# Altium PCB opg_control_unit_pcb.PcbDoc
Units mm, origin at the board's own origin, x right, y up, seen from the top; angles counter-clockwise.
Board outline 50 x 66.3 mm, 2 copper layers (Top Layer, Bottom Layer); 77 components, 60 nets, 283 pads, 75 vias.
Unrouted connection lines stored in the file: 1.
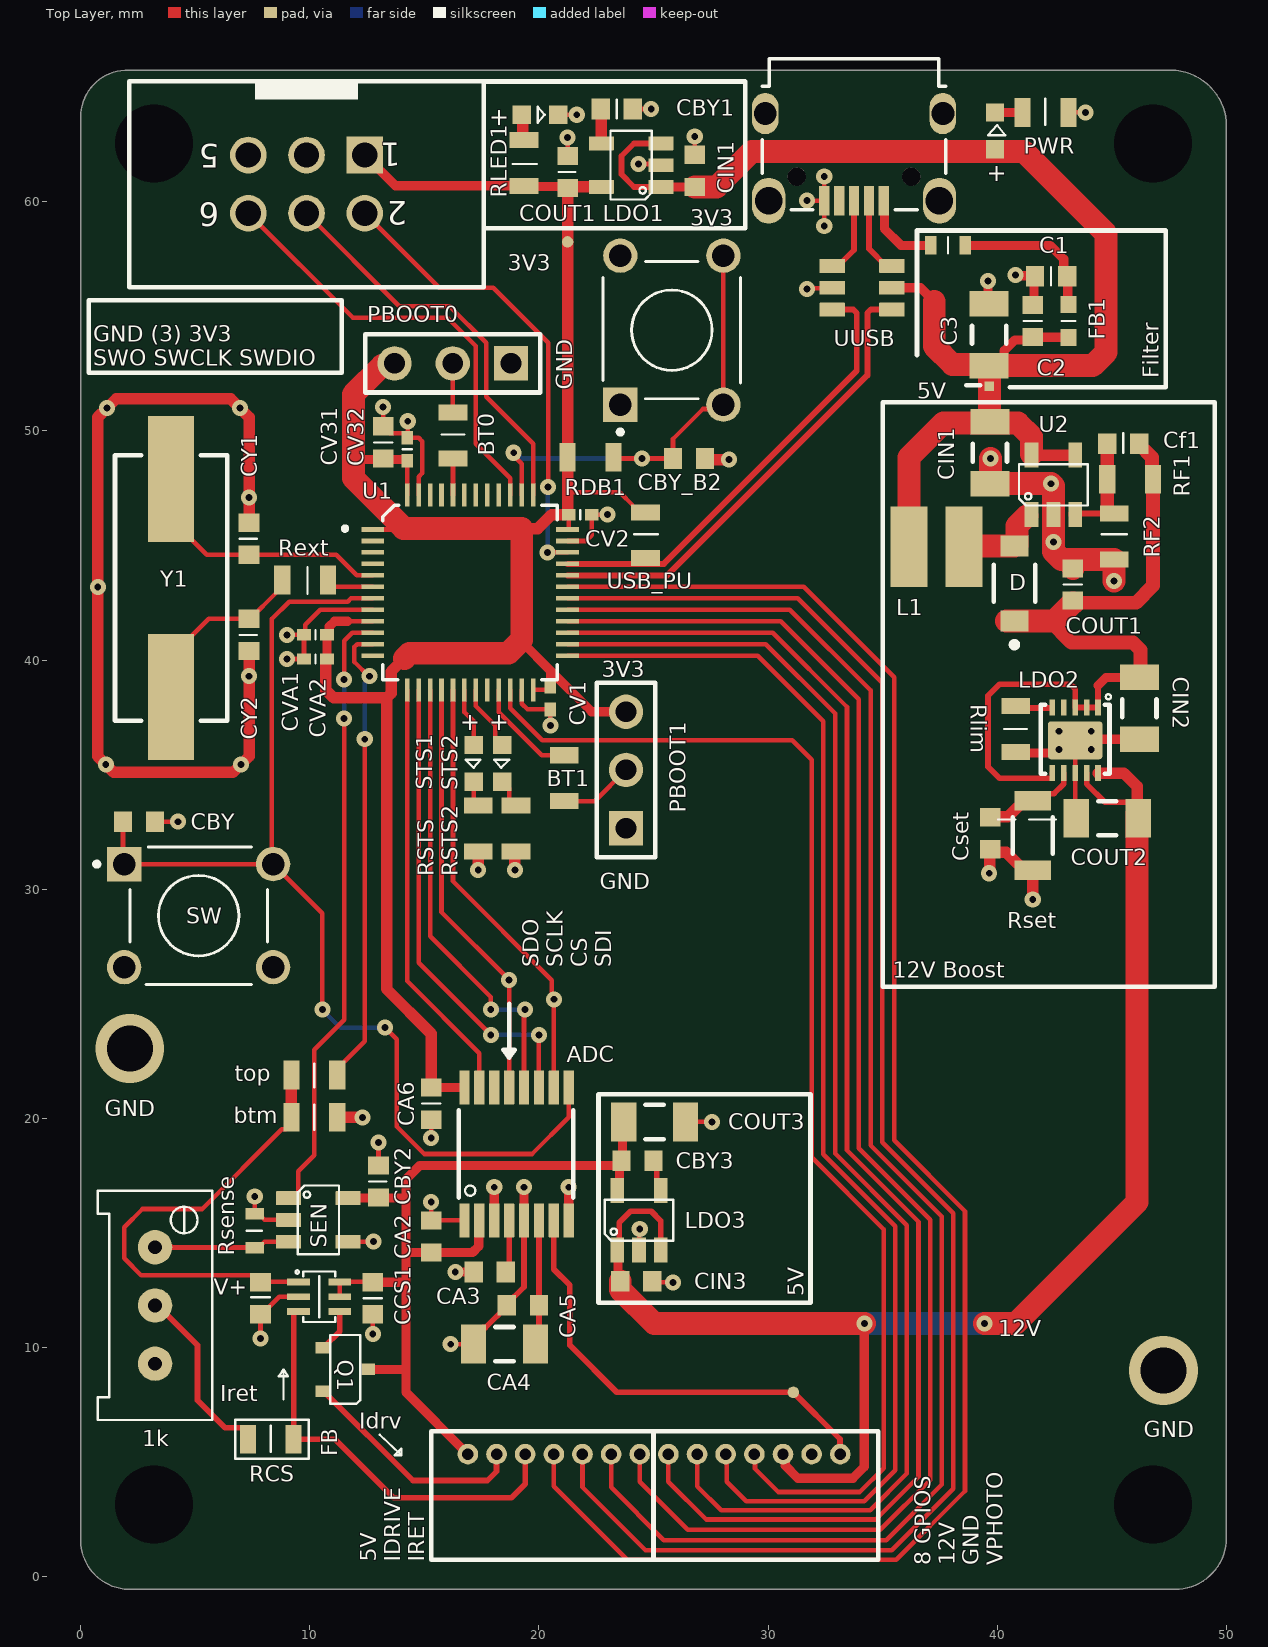
[diagram p0: Top Layer view]
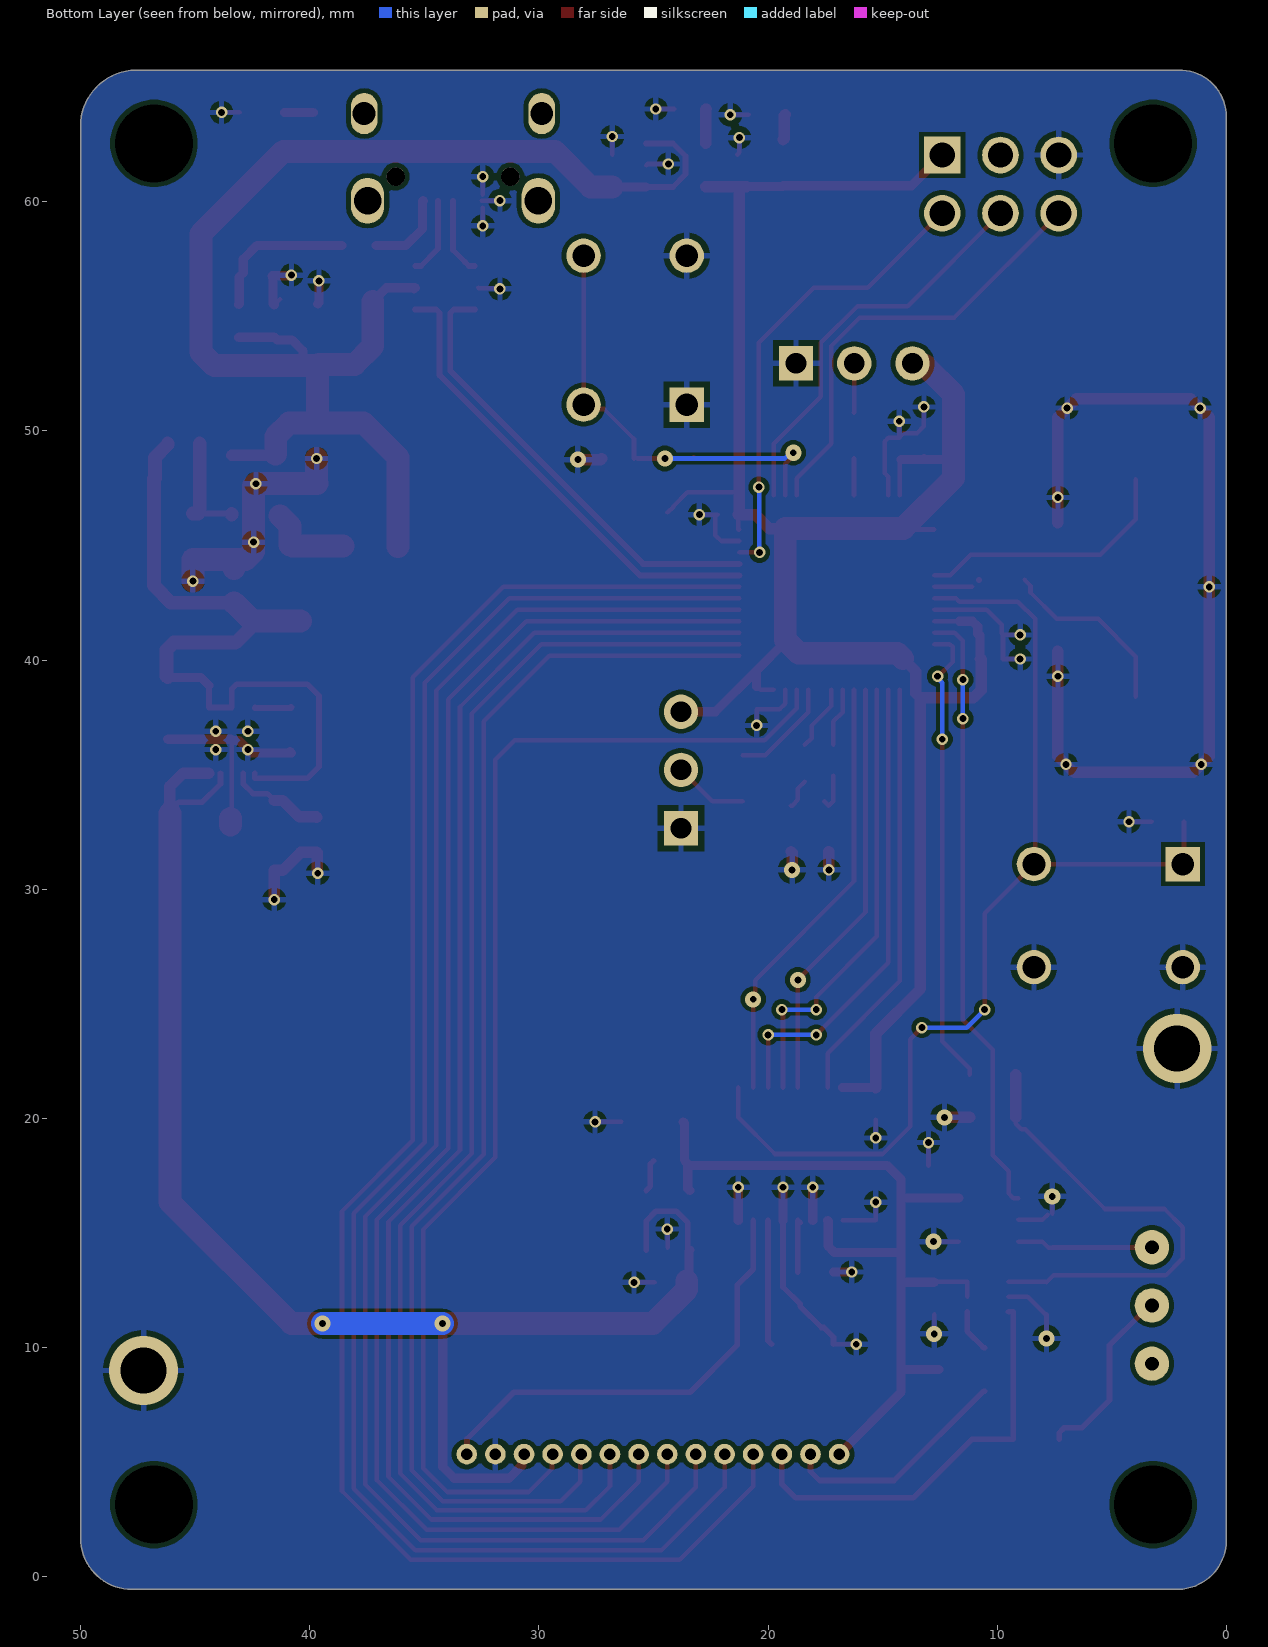
[diagram p1: Bottom Layer view, seen from below]

## Layer stack, top to bottom
Top Solder: solder mask 0.0102, Solder Resist, Dk 3.5
Top Layer: signal copper 0.0356
Dielectric 1: dielectric 0.32, FR-4, Dk 4.8
Bottom Layer: signal copper 0.0356
Bottom Solder: solder mask 0.0102, Solder Resist, Dk 3.5

## Board outline
0,1.6 0,63.7 cw(c2.05,63.7) 2.1,65.749 2.1,65.75 47.6,65.75 47.6,65.749 cw(c47.55,63.3) 50,63.3 50,1.7 cw(c47.75,1.7) 47.75,-0.55 2.15,-0.55 2.1,-0.549 cw(c2.15,1.6)

## Design rules (kind name [scope] priority, off if disabled: settings)
Clearance "Aisler Clearance" [All] p1: gap=0.2 ignorepadtopadclearanceinfootprint=FALSE except(0: Arc-Hole Track-Hole SMDPad-Hole THPad-Hole Via-Hole Fill-Hole Poly-Hole Region-Hole Text-Hole; 0.1: Arc-Arc Arc-Track Track-Track; 0.15: Arc-SMDPad Arc-THPad Arc-Fill Arc-Poly Arc-Region Track-SMDPad Track-THPad Track-Fill Track-Poly Track-Region SMDPad-SMDPad) // Aisler PCB constraints
Clearance [All] p2: gap=0.2 ignorepadtopadclearanceinfootprint=FALSE except(0: Arc-Hole Track-Hole SMDPad-Hole THPad-Hole Via-Hole Fill-Hole Poly-Hole Region-Hole Text-Hole; 0.1: SMDPad-SMDPad)
DiffPairsRouting [All] p1: maxlimit=0.254 minlimit=0.1 mostfreqgap=0.2 toplayer_minwidth=0.2 toplayer_maxwidth=0.381 toplayer_prefwidth=0.261 bottomlayer_minwidth=0.2 bottomlayer_maxwidth=0.381 bottomlayer_prefwidth=0.261 maxuncoupledlength=12.7
HoleSize [All] p1: absolutevalues=TRUE maxlimit=5 minlimit=0.025 maxpercent=80.000 minpercent=20.000
HoleToHoleClearance [All] p1: gap=0.2 allowstackedmicrovias=TRUE
MinimumSolderMaskSliver [All] p1: minsoldermaskwidth=0.1
NetAntennae [All] p1: netantennaetolerance=1
PolygonConnect [All] p1: connectstyle=Relief reliefconductorwidth=0.254 reliefentries=4 polygonreliefangle="90 Angle" airgapwidth=0.254
RoutingVias [All] p1: holewidth=1.5 width=2.5 viastyle="Through Hole" minholewidth=0.2 minwidth=0.4 maxholewidth=2 maxwidth=3
SilkToSilkClearance [All] p1: silktosilkclearance=0.1
SilkToSolderMaskClearance [IsPad] p1: minsilkscreentomaskgap=0.1 clearancetoexposedcopper=TRUE
SolderMaskExpansion [All] p1: expansion=0.102 istentingtop=FALSE
Width "Aisler Width" [All] p1: maxlimit=1 minlimit=0.1 preferedwidth=0.5 minimp=50.000000 maximp=50.000000 favimp=50.000000 // Aisler PCB Constraints
Width [All] p2: maxlimit=1 minlimit=0.1 preferedwidth=0.5 minimp=50.000000 maximp=50.000000 favimp=50.000000
23 further rules are at their usual default settings.

## Classes and differential pairs
component class U_opg_psu: Cf1 CIN2 COUT2 Cset D L1 LDO2 RF1 RF2 Rlim Rset U2
component class U_mcu_control_unit: BT0 BT1 C1 C2 C3 CBY CBY1 CIN1 COUT1 CV1 CV2 CV31 CV32 CVA1 CVA2 CY1 CY2 FB1 LDO1 PBOOT0 PBOOT1 PWR Rext RLED1 RSTS STS1 SW U1 USB_PU UUSB Y1
component class U_current_source: btm CBY2 CCS1 Q1 RCS Rsense SEN top
component class U_ads8671: ADC CA2 CA3 CA4 CA5 CA6 CBY3 CIN3 COUT3 LDO3
differential pair USB_IN: +USB_IN_P -USB_IN_N

## Components (designator, comment, footprint, x,y, rotation, side; value= is the part's Value field where it differs from the comment)
1k "BOURNS_3296W-1-102RLF" BOURNS_3296W-1 3.25,11.84 r270 top (schematic designator CS_POT)
ADC "ADS8671" ADS8671 21.3,15.55 r90 top
BT0 "100k" WRIS-KSKE_0805 16.25,49.8 r270 top (schematic designator RBOOT0)
BT1 "100k" WRIS-KSKE_0805 21.1,34.85 r90 top (schematic designator RBOOT1)
btm "100k" WRIS-KSKE_0805 10.2,20.05 r0 top (schematic designator CSdiv_btm)
C1 "" 1608[0603] 42.35,56.75 r0 top value="10n, X5R" (schematic designator USB_C1)
C2 "" 1608[0603] 41.55,54.8 r270 top value="100n, X5R" (schematic designator USB_C2)
C3 "" C1206 39.65,54.2 r270 top value="10u, X5R, 1206" (schematic designator USB_C3)
CA2 "X5R, 0603" 1608[0603] 15.3,14.85 r270 top value=1u
CA3 "X5R, 0603" 1608[0603] 17.85,13.3 r0 top value=4.7u
CA4 "X7R, 0805" C1206 18.5,10.15 r0 top value=10u
CA5 "X5R, 0603" 1608[0603] 19.3,11.85 r0 top value=1u
CA6 "X5R, 0603" 1608[0603] 15.3,20.65 r90 top value=1u
CBY "" 1608[0603] 2.55,32.95 r180 top value="10n, X5R"
CBY1 "" 1608[0603] 23.4,64.05 r180 top value="10n, X5R"
CBY2 "" 1608[0603] 13,17.25 r90 top value="0.1u, X5R"
CBY3 "" 1608[0603] 24.3,18.15 r180 top value=10nF
CBY_B2 "" 1608[0603] 26.55,48.8 r0 top value="10n, X5R"
CCS1 "" 1608[0603] 12.75,12.15 r90 top value="100n, X5R"
CCSV+ "" 1608[0603] 7.85,12.15 r270 top value="TODO, OPT"
Cf1 "" 1608[0603] 45.5,49.45 r0 top value=4.7p
CIN1 "" C1206 39.675,49.05 r90 top value=4.7u (schematic designator PSU_CIN1)
CIN1 "" 1608[0603] 26.8,61.35 r270 top value="1u, X5R"
CIN2 "" C1206 46.2,37.9 r90 top value="10u, 25 Vdc, X7R" (schematic designator PSU_CIN2)
CIN3 "X5R, 25V" 1608[0603] 24.25,12.9 r180 top value=1uF
COUT1 "" 1608[0603] 43.3,43.3 r270 top value=1u (schematic designator PSU_COUT1)
COUT1 "" 1608[0603] 21.25,61.3 r270 top value="1u, X5R"
COUT2 "" C1206 44.8,33.1 r0 top value="10u, 25 Vdc, X7R" (schematic designator PSU_COUT2)
COUT3 "X5R, 10V" C1206 25.05,19.85 r180 top value=10uF
Cset "" 1608[0603] 39.7,32.45 r90 top value=10n
CV1 "" 0402 20.5,38.35 r90 top value="0.1u, X5R"
CV2 "" 0402 21.8,46.35 r180 top value="0.1u, X5R"
CV31 "" 1608[0603] 13.2,49.5 r270 top value="4.7u, X5R"
CV32 "" 0402 14.25,49.2 r270 top value="0.1u, X5R"
CVA1 "" 0402 10.25,41.1 r0 top value="1u, X5R"
CVA2 "" 0402 10.25,40.05 r0 top value="10n, X5R"
CY1 "" 1608[0603] 7.35,45.3 r90 top value="22p, X5R"
CY2 "" 1608[0603] 7.35,41.1 r270 top value="22p, X5R"
D "MBR0540T1G" On_Semiconductor_425-04_MFG 40.75,43.35 r90 top (schematic designator D_PSU)
FB1 "33Ohm, 2.2A" "WE-CBF_0603_High Speed" 43.1,54.8 r90 top
J1 "629105150521 Footprint" 629105150521 33.75,62.95 r180 top
J2 "MOLEX_530481410_picoBlade_14pin" MOLEX_530481410_picoBlade_14pin 25,5.35 r180 top
L1 "10uH, 0.8A" WE-PD2_3521 37.35,44.95 r90 top
LDO1 "LDK130" LDK130 24,61.55 r180 top
LDO2 "LT3045" LT3045 43.4,36.5 r180 top
LDO3 "LT1761ES5-5#TRMPBF" LT1761ES5-5#TRMPBF 24.4,15.6 r90 top
LED1 "" WL-SMCW_0603_H=0.7mm 20.05,63.8 r180 top
OP1 "MAX44620AXT+T" MAX44260_ATX+T 10.4,12.2 r0 top
PBOOT0 "Header 3" HDR1X3 18.78,52.95 r180 top
PBOOT1 "Header 3" HDR1X3 23.8,32.67 r90 top
PSWD "61200621621" 61200621621 9.86,60.77 r180 top
PWR "" WL-SMCW_0603_H=0.7mm 39.9,63.1 r270 top (schematic designator LED2)
Q1 "BCW66_NPN" BCW66_NPN 11.55,9.05 r90 top
RCS "420" WRIS-KSKE_0805 8.3,6 r180 top
RDB1 "100k" WRIS-KSKE_0805 22.25,48.85 r180 top
Rext "47" WRIS-KSKE_0805 9.8,43.5 r180 top
RF1 "1M" WRIS-KSKE_0805 45.8,47.9 r0 top
RF2 "100k" WRIS-KSKE_0805 45.1,45.4 r90 top
RLED1 "2k" WRIS-KSKE_0805 19.35,61.7 r90 top
RLED2 "2k" WRIS-KSKE_0805 42.1,63.9 r180 top
Rlim "1k" WRIS-KSKE_0805 40.8,37 r90 top
RMEAS "1 Ohm, 1%" WRIS-KSKE_0603 37.85,58.1 r0 top
Rsense "1Ohm, 1%" WRIS-KSKE_0603 7.6,15.1 r270 top
Rset "121k" WRIS-KSKE_1206 41.55,32.35 r90 top
RSTS "2k" WRIS-KSKE_0805 17.35,32.65 r90 top
RSTS2 "2k" WRIS-KSKE_0805 19,32.65 r90 top
SEN "INA180A2/4" INA180Ax 10.35,15.55 r0 top
STS1 "" WL-SMCW_0603_H=0.7mm 17.15,35.5 r90 top (schematic designator LED_STS)
STS2 "" WL-SMCW_0603_H=0.7mm 18.4,35.5 r90 top (schematic designator LED2_STS)
SW "1825910-6" SW_1825910-6-4 5.15,28.85 r0 top
SW2 "1825910-6" SW_1825910-6-4 25.8,54.4 r90 top
top "50k" WRIS-KSKE_0805 10.2,21.9 r180 top (schematic designator CSdiv_top)
U1 "STM32F103CBT6" LQFP48_0R5_7x7 17,42.95 r270 top
U2 "LT1615" LT1615 42.45,47.65 r0 top
USB_PU "2k" WRIS-KSKE_0805 24.65,45.45 r90 top
UUSB "TPD2S017DBVR" TPD2S017DBVR 34.1,56.25 r0 top
Y1 "8MHz" WE-XTAL_HC49/4HSMX 3.95,43.15 r90 top

## Footprints (in the part's own frame and the unit in brackets; to place one, negate y for a bottom-side part, rotate by r counter-clockwise, add the part's x,y. Pads: shape width x height; smd on the part's side, far side on the other; paste and mask are expansions set on the pad)
0402 [mm] "Chip Capacitor, Body 1.0x0.5mm, IPC High Density"
  rect 0.6x0.5 smd: 1(-0.5,0) 2(0.5,0)
  body extent -0.55,-0.3 0.55,0.3, height 1.3
1608[0603] [mm] "Chip Capacitor, Body 1.6x0.8mm, IPC High Density"
  rect 0.8x0.9 smd: 1(-0.7,0) 2(0.7,0)
  body extent -0.87,-0.48 0.87,0.48, height 1.3
61200621621 [mm] "6 pins, straight, gold plating"
  rect 1.6x1.6 hole 1.1: 1(-2.54,-1.27)
  round 1.6 hole 1.1: 2(-2.54,1.27) 3(0,-1.27) 4(0,1.27) 5(2.54,-1.27) 6(2.54,1.27)
  silkscreen extent -7.74,-4.5 7.74,4.5, body extent -7.64,-4.43 7.64,4.75, height 9.13
629105150521 [mm] "Micro USB 2.0 SMT Type B Horizontal 5 Contacts High Current"
  rect 0.45x1.3 smd: 1(-1.3,2.9) 2(-0.65,2.9) 3(0,2.9) 4(0.65,2.9) 5(1.3,2.9)
  round 0.8 hole 0.8 unplated: MH1(-2.5,1.85) MH2(2.5,1.85)
  oval 1.15x1.8 hole 1: Shell(-3.875,-0.9) Shell(3.875,-0.9)
  oval 1.45x2 hole 1.2: Shell(-3.725,2.9) Shell(3.725,2.9)
  silkscreen extent -4,-3.3 4,3.3, body extent -4,-3.3 4,3.3, height 2.75
ADS8671 [mm] "14-Bit, High-Speed, Single Supply, SAR ADC Data Acq. System with progr., bipolar input ranges"
  rrect15% 1.5x0.45 smd: 1(0,4.55) 2(0,3.9) 3(0,3.25) 4(0,2.6) 5(0,1.95) 6(0,1.3) 7(0,0.65) 8(0,0) 9(5.8,0) 10(5.8,0.65) 11(5.8,1.3) 12(5.8,1.95) 13(5.8,2.6) 14(5.8,3.25) 15(5.8,3.9) 16(5.8,4.55)
  silkscreen extent 1,-0.2 4.8,4.8, body extent -0.3,-0.18 6.1,4.78, height 1.2
BCW66_NPN [mm] "Nexperia npn bjt transistor, general purpose"
  rect 0.5x0.6 smd: B(0.95,1) C(0,-1) E(-0.95,1)
  silkscreen extent -1.5,-0.65 1.5,0.65
BOURNS_3296W-1 [mm] "3296 - 3/8  Square Trimpot Trimming Potentiometer"
  round 1.5 hole 0.6: 1(-2.54,0) 2(0,0) 3(2.54,0)
  silkscreen extent -5,-2.5 5,2.5, body extent -4.77,-2.41 4.76,2.42, height 11.55
C1206 [mm] "Chip Capacitor, Body 3.2x1.6mm, IPC High Density"
  rect 1.1x1.7 smd: 1(-1.35,0) 2(1.35,0)
  silkscreen extent -0.4,-0.75 0.4,0.75, body extent -1.7,-0.9 1.7,0.9, height 1.3
HDR1X3 [mm] "Connector; Header; 3 Position"
  rect 1.5x1.5 hole 0.9: 1(0,0)
  round 1.5 hole 0.9: 2(2.54,0) 3(5.08,0)
  silkscreen extent -1.27,-1.27 6.35,1.27
INA180Ax [mm] "INA180AxLow- and High-SideVoltageOutput,Current-SenseAmplifiers"
  rrect7% 1.1x0.6 smd: 1(-1.275,0.975) 2(-1.275,0.025) 3(-1.275,-0.925) 4(1.325,-0.925) 5(1.325,0.975)
  silkscreen extent -0.88,-1.48 0.92,1.52, body extent -1.38,-1.43 1.42,1.47, height 1.55
LDK130 [mm] "300 mA low quiescent current very low noise LDO"
  rrect7% 1.1x0.6 smd: 1(-1.325,0.9) 2(-1.325,-0.05) 3(-1.325,-1) 4(1.275,-1) 5(1.275,0.9)
  silkscreen extent -0.93,-1.55 0.87,1.45, body extent -1.43,-1.5 1.37,1.4, height 1.55
LQFP48_0R5_7x7 [mm] "Low & medium-density value line, advanced ARM-based 32-bit MCU"
  rect 0.2x1 smd: 1(-2.75,-4.25) 2(-2.25,-4.25) 3(-1.75,-4.25) 4(-1.25,-4.25) 5(-0.75,-4.25) 6(-0.25,-4.25) 7(0.25,-4.25) 8(0.75,-4.25) 9(1.25,-4.25) 10(1.75,-4.25) 11(2.25,-4.25) 12(2.75,-4.25) 25(2.75,4.25) 26(2.25,4.25) 27(1.75,4.25) 28(1.25,4.25) 29(0.75,4.25) 30(0.25,4.25) 31(-0.25,4.25) 32(-0.75,4.25) 33(-1.25,4.25) 34(-1.75,4.25) 35(-2.25,4.25) 36(-2.75,4.25)
  rect 1x0.2 smd: 13(4.25,-2.75) 14(4.25,-2.25) 15(4.25,-1.75) 16(4.25,-1.25) 17(4.25,-0.75) 18(4.25,-0.25) 19(4.25,0.25) 20(4.25,0.75) 21(4.25,1.25) 22(4.25,1.75) 23(4.25,2.25) 24(4.25,2.75) 37(-4.25,2.75) 38(-4.25,2.25) 39(-4.25,1.75) 40(-4.25,1.25) 41(-4.25,0.75) 42(-4.25,0.25) 43(-4.25,-0.25) 44(-4.25,-0.75) 45(-4.25,-1.25) 46(-4.25,-1.75) 47(-4.25,-2.25) 48(-4.25,-2.75)
  silkscreen extent -3.81,-5.52 3.81,3.81, body extent -3.5,-3.5 3.5,3.5, height 1.6
LT1615 [mm] "Micropower Step-up DC/DC Converter in ThinSOT"
  rrect7% 0.6x1.1 smd: 1(-0.95,-1.3) 2(0,-1.3) 3(0.95,-1.3) 4(0.95,1.3) 5(-0.95,1.3)
  silkscreen extent -1.5,-0.9 1.5,0.9, body extent -1.45,-1.4 1.45,1.4, height 1.55
LT1761ES5-5#TRMPBF [mm]
  rrect7% 1.1x0.6 smd: 1(-1.342,0.982) 2(-1.342,0.032) 3(-1.342,-0.918) 4(1.258,-0.918) 5(1.258,0.982)
  silkscreen extent -0.94,-1.47 0.86,1.53, body extent -1.44,-1.42 1.36,1.48, height 1.55
LT3045 [mm] "20V, 500mA, Ultralow Noise, Ultrahigh PSRR LDO"
  rect 0.25x0.7 smd: 1(-1,-1.43) 2(-0.5,-1.43) 3(0,-1.43) 4(0.5,-1.43) 5(1,-1.43) 6(1,1.43) 7(0.5,1.43) 8(0,1.43) 9(-0.5,1.43) 10(-1,1.43)
  rrect15% 2.38x1.65 smd paste-2: 8(0,0)
  silkscreen extent -1.56,-2.01 1.5,1.45, body extent -1.55,-1.53 1.45,1.48, height 0.75
MAX44260_ATX+T [mm] "Operationsverstärker 1.8V, 15MHz Low-Offs et, Low-Power, Rail"
  rrect0% 1x0.3 smd mask+0.07: 1(-0.89,0.67) 2(-0.89,0.02) 3(-0.89,-0.63) 4(0.91,-0.63) 5(0.91,0.02) 6(0.91,0.67)
  silkscreen extent -1.02,-1.08 0.71,1.17, body extent -0.99,-0.98 1.01,1.02, height 1.05
MOLEX_530481410_picoBlade_14pin [mm] "pico Blade connector wire-to-board"
  round 0.9 hole 0.5: 1(-8.15,0) 2(-6.9,0) 3(-5.65,0) 4(-4.4,0) 5(-3.15,0) 6(-1.9,0) 7(-0.65,0) 8(0.6,0) 9(1.85,0) 10(3.1,0) 11(4.35,0) 12(5.6,0) 13(6.85,0) 14(8.1,0)
  silkscreen extent -9.8,-1 9.7,4.6, body extent -9.65,-0.92 9.6,4.57, height 3.6
On_Semiconductor_425-04_MFG [mil]
  rect 36x48 smd paste+0 mask+0: 1(-64.5,0) 2(64.5,0)
  silkscreen extent -110,-35 32,35, body extent -86,-39 86,39, height 10
SW_1825910-6-4 [mm]
  rect 1.498x1.498 hole 0.99: 1(-3.25,2.25)
  round 1.498 hole 0.99: 2(3.25,2.25) 3(-3.25,-2.25) 4(3.25,-2.25)
  silkscreen extent -4.54,-3 3,3
TPD2S017DBVR [mm] "2-Channel Ultra-Low Clamp Voltage ESD  Solution With Series-Resistor Isolation"
  rrect5% 1.1x0.6 smd: 1(-1.3,0.95) 2(-1.3,0) 3(-1.3,-0.95) 4(1.3,-0.95) 5(1.3,0) 6(1.3,0.95)
  body extent -1.4,-1.45 1.4,1.45, height 1.2
"WE-CBF_0603_High Speed" [mm] "SMD EMI Suppression Ferrite  Bead, body 1.6x0.8mm"
  rect 0.75x0.7 smd: 1(-0.725,0) 2(0.725,0)
  body extent -0.8,-0.4 0.8,0.4, height 0.8
WE-PD2_3521 [mm] "SMD Power Inductor, 2-Leads, body 3x3.5mm"
  rect 3.5x1.6 smd: 1(0,1.2) 2(0,-1.2)
  body extent -1.5,-1.68 1.5,1.68, height 2.12
WE-XTAL_HC49/4HSMX [mm] "Quartz Crystal, size HC49/4HSMX, body 11.4x4.9mm"
  rect 5.5x2 smd: 1(-4.75,0) 2(4.75,0)
  silkscreen extent -5.8,-2.45 5.8,2.45, body extent -6.7,-2.45 6.7,2.45, height 4.3
WL-SMCW_0603_H=0.7mm [mm] "SMD Mono-color Chip LED, body 1.6x0.8mm"
  rect 0.8x0.8 smd: 1(-0.8,0) 2(0.8,0)
  body extent -0.8,-0.4 0.8,0.4, height 0.7
WRIS-KSKE_0603 [mm] "Thick Film Resistors, SMT, body size 1.6x0.8mm"
  rect 0.5x0.8 smd: 1(-0.75,0) 2(0.75,0)
  body extent -0.8,-0.4 0.8,0.4, height 0.45
WRIS-KSKE_0805 [mm] "Thick Film Resistors, SMT, body size 2x1.25mm"
  rect 0.7x1.25 smd: 1(-1,0) 2(1,0)
  body extent -1,-0.62 1,0.63, height 0.6
WRIS-KSKE_1206 [mm] "Thick Film Resistors, SMT, body size 3.1x1.6mm"
  rect 0.85x1.6 smd: 1(-1.525,0) 2(1.525,0)
  silkscreen extent -0.8,-0.87 0.8,0.87, body extent -1.55,-0.8 1.55,0.8, height 0.6

## Part data
1k: library part BOURNS_3296W-1-104RLF, "Vertical Potentiometer, multi-turn, 10%"
ADC: "14-Bit, High-Speed, Single Supply, SAR ADC Data Acq. System with progr., bipolar input ranges"
BT0 BT1 btm RCS RDB1 Rext RF1 RF2 RLED1 RLED2 Rlim RSTS RSTS2 top USB_PU: library part 560050320001, "WRIS-KSKE SMT Thick Film Resistor, size 0805, 0.1Ohm, 0.33W", Manufacturer="Wurth Elektronik", Operating Temperature="-55 to +155degC", Rated Current=1.81A, Rated Power=0.33W, Resistance=0.1Ohm, Resistance Tolerance=+/-1%, Temperature Coefficient of Resistance=250ppm/degC, ComponentLink1Description=Manufacturer, ComponentLink1URL=http://www.we-online.de, ComponentLink2Description=Datasheet, ComponentLink2URL=https://www.we-online.com/catalog/datasheet/560050320001.pdf, Height=0.6mm, Length=2mm, Manufacturer Part Number=560050320001, Mounting Technology=SMT, Packaging="Tape and Reel", Published Date="May 2020", Size=0805, Technical Reference=KE0805R100F103LAATP0000, Width=1.25mm
C1 C2 C3 CA2 CA3 CA4 CA5 CA6 CBY CBY1 CBY2 CBY3 CBY_B2 CCS1 CCSV+ Cf1 CIN1 CIN1 CIN2 CIN3 COUT1 COUT1 COUT2 COUT3 Cset CV1 CV2 CV31 CV32 CVA1 CVA2 CY1 CY2: library part "Cap Semi", "Capacitor (Semiconductor SIM Model)", LatestRevisionDate=29-May-2009, LatestRevisionNote="IPC-7351 Footprint Added.", PackageDescription="Chip Capacitor", PackageReference=C1206, Published=8-Jun-2000, Publisher="Altium Limited"
FB1: library part 742792605, "WE-CBF SMT EMI Suppression Ferrite Bead, size 0603, 33Ohm, 2.2A", DC Resistance max.=0.1Ohm, Manufacturer="Wurth Elektronik", Operating Temperature="-55 to +125degC", Rated Current=2.2A, ComponentLink1Description=Manufacturer, ComponentLink1URL=http://www.we-online.de, ComponentLink2Description=Datasheet, ComponentLink2URL=https://www.we-online.com/catalog/datasheet/742792605.pdf, Impedance @100MHz=33Ohm, Impedance max.=50Ohm, Manufacturer Part Number=742792605, Mounting Technology=SMT, Packaging="Tape and Reel", Published Date="March 2020", Size=0603, Type="High Speed"
J1: library part 629105150921, "Micro USB 2.0 Type AB, Receptacle, Horizontal, SMT", Manufacturer="Wurth Elektronik", Operating Temperature="-40 to +85degC", Rated Current=1.8A, Working Voltage=30VAC, Application="Micro USB 2.0", ComponentLink1Description=Manufacturer, ComponentLink1URL=http://www.we-online.de, ComponentLink2Description=Datasheet, ComponentLink2URL=https://katalog.we-online.com/em/datasheet/629105150921.pdf, Gender=Receptacle, Interface Type="Type AB", Manufacturer Part Number=629105150921, Mounting Technology=SMT, Packaging="Tape and Reel", Pin Number=5, Published Date="August 2020", Type=Horizontal
L1: library part 7447732110, "WE-PD2 SMT Power Inductor, size 3521, 10uH, 0.8A", DC Resistance max.=0.3Ohm, DC Resistance typ.=0.237Ohm, Inductance=10uH, Manufacturer="Wurth Elektronik", Operating Temperature="-40 to +125degC", Rated Current=0.8A, Saturation Current=1.23A, Self Resonant Frequency=45MHz, ComponentLink1Description=Manufacturer, ComponentLink1URL=http://www.we-online.de, ComponentLink2Description=Datasheet, ComponentLink2URL=https://www.we-online.com/catalog/datasheet/7447732110.pdf, Manufacturer Part Number=7447732110, Mounting Technology=SMT, Packaging="Tape and Reel", Published Date="April 2020", Size=3521
LDO1: "300 mA low quiescent current very low noise LDO"
LDO2: "20V, 500mA, Ultralow Noise, Ultrahigh PSRR LDO"
LED1 PWR STS1 STS2: library part 150060AS75000, "WL-SMCW SMT Mono-color Chip LED Waterclear, size 0603, Amber, 2V, 140deg", Emitting Color=Amber, Forward Voltage typ.=2V, Operating Temperature="-40 to +85degC", Chip Technology=AlInGaP, ComponentLink1Description=Manufacturer, ComponentLink1URL=http://www.we-online.de, ComponentLink2Description=Datasheet, ComponentLink2URL=https://www.we-online.com/catalog/datasheet/150060AS75000.pdf, Dominant Wavelength typ.=605nm, Luminous Intensity typ.=130mcd, Mounting Technology=SMT, Packaging="Tape and Reel", Part Number=150060AS75000, Peak Wavelength typ.=610nm, Published Date="December 2019", Publisher="Wurth Elektronik", Size=0603, Viewing Angle=140deg
OP1: "Operationsverstärker 1.8V, 15MHz Low-Offs et, Low-Power, Rail"
PBOOT0 PBOOT1: "Header, 3-Pin", LatestRevisionDate=17-Jul-2002, LatestRevisionNote="Re-released for DXP Platform.", Publisher="Altium Limited"
PSWD: "Male Box Header WR-BHD, THT, Vertical, pitch 2.54 mm, 6 pins", Contact Resistance="20 mOhm", Operating Temperature="-40 to 125 degC", Withstanding Voltage="500 VAC", Working Voltage="250 VAC", ComponentLink1Description=Manufacturer, ComponentLink1URL=http://www.we-online.de, ComponentLink2Description=Datasheet, ComponentLink2URL=https://katalog.we-online.de/em/datasheet/6120xx21621.pdf, Gender=Male, Mounting Technology=THT, Orientation=Vertical, Packaging=Tray, Part Number=61200621621, Pin Number=6, Pitch="2.54 mm", Published Date="August 2018", Publisher="Wurth Elektronik"
RMEAS: library part 560050316011, "WRIS-KSKE SMT Thick Film Resistor, size 0603, 0.5Ohm, 0.25W", Manufacturer="Wurth Elektronik", Operating Temperature="-55 to +155degC", Rated Current=0.7A, Rated Power=0.25W, Resistance=0.5Ohm, Resistance Tolerance=+/-1%, Temperature Coefficient of Resistance=+/-100ppm/degC, ComponentLink1Description=Manufacturer, ComponentLink1URL=http://www.we-online.de, ComponentLink2Description=Datasheet, ComponentLink2URL=https://www.we-online.com/catalog/datasheet/560050316011.pdf, Height=0.45mm, Length=1.6mm, Manufacturer Part Number=560050316011, Mounting Technology=SMT, Packaging="Tape and Reel", Published Date="May 2020", Size=0603, Technical Reference=KE0603R500F104KAATP0000, Width=0.8mm
Rsense: library part 560050316001, "WRIS-KSKE SMT Thick Film Resistor, size 0603, 0.1Ohm, 0.25W", Manufacturer="Wurth Elektronik", Operating Temperature="-55 to +155degC", Rated Current=1.58A, Rated Power=0.25W, Resistance=0.1Ohm, Resistance Tolerance=+/-1%, Temperature Coefficient of Resistance=250ppm/degC, ComponentLink1Description=Manufacturer, ComponentLink1URL=http://www.we-online.de, ComponentLink2Description=Datasheet, ComponentLink2URL=https://www.we-online.com/catalog/datasheet/560050316001.pdf, Height=0.45mm, Length=1.6mm, Manufacturer Part Number=560050316001, Mounting Technology=SMT, Packaging="Tape and Reel", Published Date="May 2020", Size=0603, Technical Reference=KE0603R100F104LAATP0000, Width=0.8mm
Rset: library part 560050332001, "WRIS-KSKE SMT Thick Film Resistor, size 1206, 0.05Ohm, 0.5W", Manufacturer="Wurth Elektronik", Manufacturer Part Number=560050320001, Operating Temperature="-55 to +155degC", Rated Current=1.81A, Rated Power=0.33W, Resistance=0.1Ohm, Resistance Tolerance=+/-1%, Temperature Coefficient of Resistance=250ppm/degC, ComponentLink1Description=Manufacturer, ComponentLink1URL=http://www.we-online.de, ComponentLink2Description=Datasheet, ComponentLink2URL=https://www.we-online.com/catalog/datasheet/560050320001.pdf, Height=0.6mm, Length=2mm, Mounting Technology=SMT, Packaging="Tape and Reel", Published Date="May 2020", Size=0805, Technical Reference=KE0805R100F103LAATP0000, Width=1.25mm
SEN: library part INA180Ax, "INA180Ax Low- and High-SideVoltageOutput,Current-SenseAmplifiers"
SW SW2: "Switch Push Button OFF _ON_ SPST Round Button 0.05A 24VDC Momentary Contact PC Pins Thru-Hole", Contact_Current_Rating="50 mA", Package=None, Configuration_Pole-Throw="Single Pole - Single Throw", Digi-Key_Part_Number=450-1650-ND, Digi-Key_Purchase_URL=https://www.digikey.com/product-detail/en/te-connectivity-alcoswitch-switches/1825910-6/450-1650-ND/1632536?utm_source=snapeda&utm_medium=aggregator&utm_campaign=symbol, EU_RoHS_Compliance=Compliant, MF="TE Connectivity", MP=1825910-6, SnapEDA_Link=https://www.snapeda.com/parts/1825910-6/TE%20Connectivity%20ALCOSWITCH%20Switches/view-part/424522/?ref=snap, TE_purchase_URL=https://www.te.com/usa-en/product-1825910-6.html?te_bu=Cor&te_type=disp&te_campaign=seda_glo_cor-seda-global-disp-prtnr-fy19-seda-model-bom-cta_sma-317_1&elqCampaignId=32493
U1: "Medium-density performance line ARM-based 32-bit MCU with 64KB Flash", Manuf_1=STM, Manuf_Part_1=STM32F103C8T6, Distrib=ST, ECCN_US/EU=3A991A2/NEC, Order=STM32F103C8T6, Provided=ST, Ref St=9175981
U2: "Micropower Step-up DC/DC Converter in ThinSOT"
UUSB: "2-Channel Ultra-Low Clamp Voltage ESD / Solution With Series-Resistor Isolation"
Y1: library part 830003151, "WE-XTAL Quartz Crystal, SMT, HC49/4HSMX, 8MHz, +/-30ppm", Frequency Stability=+/-50ppm, Frequency Tolerance=+/-30ppm, Load Capacitance=16pF, Manufacturer="Wurth Elektronik", Operating Temperature="-10 to +60degC", ComponentLink1Description=Manufacturer, ComponentLink1URL=http://www.we-online.de, ComponentLink2Description=Datasheet, ComponentLink2URL=https://katalog.we-online.com/pbs/datasheet/830003151.pdf, Frequency=8MHz, Manufacturer Part Number=830003151, Mounting Technology=SMT, Packaging="Tape and Reel", Published Date="July 2020", Size=HC49/4HSMX

## Free pads (board coordinates)
  round 1.1 hole 3.4 unplated: 2(3.2,62.55) 2(46.8,62.55) 3(46.8,3.15) 4(3.2,3.15)
  rect 0.4x0.4 smd: 6(39.65,51.95)
  round 0.5 smd: 10(31.1,8.05) 11(21.25,58.25)

## Via types
v1: diameter 0.7/0.5 (per signal layer), hole 0.3, Top Layer to Bottom Layer, 60 vias
v2: diameter 0.7, hole 0.3, Top Layer to Bottom Layer, 13 vias
v3: diameter 3, hole 2, Top Layer to Bottom Layer, 2 vias

## Nets (pads, with @x,y where several pads share a name; then routed paths per layer and width w, separated by ;. In a path a pad name is that pad's centre, name@x,y a point inside that pad or via, vN(x,y) a via of type N, cw(c..) or ccw(c..) an arc to the next point about the centre after c; other vN are vias at no path point)
3V3CC: ADC.16 CA6.2 COUT1.2@21.25,60.6 CV1.2 CV2.2 CV31.2 CV32.2 CVA1.2 CVA2.2 LDO1.5 pad.11 PBOOT0.3 PBOOT1.3 PSWD.1 RDB1.2 RLED1.1 U1.1 U1.9 U1.24 U1.36 U1.48 USB_PU.2 | length 98.1
  Top Layer w0.2: 11.65,41.7 U1.9 ; U1.1 14.05,45.7 14.1,45.75 ; CV32.2@14.2,48.75 CV32.2 U1.48 ; U1.24 20.35,38.7 CV1.2 ; U1.36 21.3,45.7 CV2.2 ; 21.25,47.15 21.421,47.321 23.529,47.321 24.125,46.725 24.125,46.7 24.375,46.45 USB_PU.2@24.4,46.45
  Top Layer w0.4: CVA2.2 CVA1.2 10.8,41.1 10.85,41.15 10.85,41.466 11.084,41.7 11.65,41.7 ; 11.9,48.75 13.15,48.75 CV31.2 13.25,48.75 CV32.2@14.2,48.75 ; PSWD.1 13.74,60.7 RLED1.1 19.375,60.675 COUT1.2@20.925,60.675 ; CA6.2 ADC.16 ; 19.25,40.886 19.25,40.8 20.5,39.55 ; CV1.2 20.5,39.55 ; PBOOT1.3 22.3,37.75 20.5,39.55
  Top Layer w0.5: CVA2.2 10.704,40.05 10.704,39.485 10.7,39.481 10.7,38.693 11.043,38.35 13.35,38.35 ; 14.125,40.075 13.55,39.5 13.55,38.55 13.35,38.35 ; CA6.2 15.3,23.7 13.35,25.65 13.35,38.35 ; 19.25,45.739 19.939,45.739 20.55,46.35 CV2.2 21.25,46.35 21.25,47.15 RDB1.2 21.25,60.6 21.25,60.64 COUT1.2@21.24,60.65 ; COUT1.2@20.95,60.65 COUT1.2@21.24,60.65 ; LDO1.5 COUT1.2@21.24,60.65
  Top Layer w1: PBOOT0.3 13.604,52.854 13.154,52.854 11.9,51.6 11.9,48.75 11.9,47.95 14.1,45.75 ; 14.089,45.739 19.25,45.739 19.25,40.886 18.664,40.3 14.35,40.3 14.125,40.075
5V_AVDD: ADC.2 CA2.2 CBY2.1 CBY3.2 CCS1.2 COUT3.2 J2.14 LDO3.5 OP1.5 OP1.6 Q1.C SEN.5 | length 37.8
  Top Layer w0.2: OP1.5 OP1.6 12.73,12.87 CCS1.2
  Top Layer w0.4: SEN.5 13,16.525 14.175,16.525 14.2,16.55 ; Q1.C 14.2,9.05 ; CCS1.2 14.2,12.85 ; 14.3,14.15 CA2.2 17.1,14.15 17.375,14.425 17.375,15.525 ADC.2 ; J2.14 14.2,8.05 14.2,9.05 ; LDO3.5 23.509,16.949 CBY3.2@23.509,17.9 ; COUT3.2 23.65,19.8 23.65,18.2 CBY3.2 23.6,18.1 23.45,17.95 14.8,17.95 14.2,17.35 14.2,16.55 ; 14.2,9.05 14.2,12.85 ; 14.2,12.85 14.2,14.15 14.2,16.55
5VCC_USB: C2.2 C3.2 CIN1.2 FB1.1 L1.1 LDO1.1 LDO1.3 pad.6 PWR.2 U2.4 U2.5 UUSB.5 | length 62.8
  Top Layer w0.25: LDO1.1 24.15,60.65 23.6,61.2 23.6,62 24.15,62.55 LDO1.3
  Top Layer w0.4: LDO1.1 CIN1.2@26.8,60.65 ; UUSB.5@35.45,56.2 UUSB.5 36.65,56.25 37.25,55.65 ; CIN1.2@39.65,50.35 CIN1.2@39.65,50.4 ; C3.2@39.95,52.85 40.3,53.2 40.3,53.5 40.776,53.976 41.426,53.976 C2.2 41.563,54.087 43.088,54.087 FB1.1
  Top Layer w0.5: U2.5@41.5,49 41.55,48.95 U2.4
  Top Layer w1: CIN1.2@26.8,60.65 27.75,60.65 29.3,62.2 41.15,62.2 44.75,58.6 44.75,53.436 44.164,52.85 39.95,52.85 C3.2 39.6,52.9 38.05,52.9 37.25,53.7 37.25,55.65 ; L1.1 36.15,48.85 37.65,50.35 CIN1.2@39.65,50.35 ; C3.2@39.662,52.838 39.662,50.413 39.675,50.4 39.725,50.35 40.9,50.35 41.486,49.764 41.486,49 U2.5@41.5,49
5VCC_USB_IN: C1.2 FB1.2 RMEAS.2 | length 6.6
  Top Layer w0.4: RMEAS.2 42.3,58.1 42.901,57.499 42.901,56.899 43.075,56.725 43.075,55.55 FB1.2
AUX_IN: CBY_B2.1 RDB1.1 SW2.3 SW2.4 U1.38 | length 20.3
  Top Layer w0.2: v2(18.9,49.05) 18.9,48.915 19.25,48.565 U1.38 ; RDB1.1 23.3,48.8 v2(24.5,48.8) CBY_B2.1@25.7,48.8 ; CBY_B2.1 25.85,49.65 27.158,50.958 27.858,50.958 SW2.3 SW2.4
  Bottom Layer w0.2: v2(18.9,49.05) 19.017,49.05 19.267,48.8 v2(24.5,48.8)
BOOT0: BT0.2 U1.44 | length 1.6
  Top Layer w0.2: U1.44 BT0.2
BOOT1: BT1.2 U1.21 | length 4.6
  Top Layer w0.2: U1.21 18.25,37.725 20.125,35.85 BT1.2
FB: J2.12 OP1.3 RCS.1 | length 18.5
  Top Layer w0.25: OP1.3 9.325,11.57 9.3,11.545 RCS.1 9.45,6 11.1,6 13.65,3.45 18.8,3.45 19.4,4.05 J2.12
GND: ADC.1 ADC.3 ADC.5 ADC.8 btm.2 C1.1 C2.1 C3.1 CA2.1 CA3.1 CA4.1 CA5.1 CA6.1 CBY1.1 CBY2.2 CBY.1 CBY_B2.2 CCS1.1 CCSV+.2 CIN1.1 CIN2.1 CIN3.1 COUT1.1 COUT2.1 COUT3.1 Cset.1 CV1.1 CV2.1 CV31.1 CV32.1 CVA1.1 CVA2.1 CY1.2 CY2.2 J1.5 J2.2 LDO1.2 LDO2.8 LDO3.2 LED1.1 OP1.2 PBOOT0.1 PBOOT1.1 PSWD.5 RF2.1 RLED2.1 Rlim.1 Rsense.1 Rset.1 RSTS2.1 RSTS.1 SEN.2 SEN.4 SW2.1 SW2.2 SW.3 SW.4 U1.8 U1.23 U1.35 U1.47 U2.2 UUSB.2 | length 123.7
  Top Layer w0.2: CBY.1 v1(4.25,32.95) ; Rsense.1 v2(7.6,16.6) ; Rsense.1@7.8,15.8 8.025,15.575 SEN.2 ; v2(7.85,10.4) CCSV+.2 7.9,11.45 8.67,12.22 OP1.2 ; v1(9,40.05) CVA2.1 CVA1.1 ; v1(9,41.1) CVA1.1 ; SEN.4 v2(12.775,14.625) ; v2(12.75,10.6) CCS1.1 ; U1.8 10.45,42.2 9.8,41.55 9.8,41.15 CVA1.1 ; CBY2.2@13,17.94 v1(13,18.95) ; CV31.1 13.5,49.9 14.1,49.9 14.25,49.75 CV32.1 14.75,49.7 14.9,49.55 14.9,48.15 14.75,48 U1.47 ; CV31.1@13.2,50.25 v1(13.2,51.05) ; CV32.1@14.275,49.775 v1(14.275,50.425) ; v1(15.3,16.35) CA2.1 ADC.1 ; v1(15.3,19.15) CA6.1 ; v1(16.15,10.15) CA4.1 ; CA5.1 CA5.1@18.6,11.9 ; U1.23 19.25,38.1 19.5,37.85 CV1.1 v1(20.5,37.15) ; LED1.1 v1(21.65,63.8) ; U1.35 22.05,45.2 22.3,45.45 CV2.1 ; v1(21.25,62.8) 21.25,62.15 COUT1.1@21.35,62.05 ; CV2.1@22.2,46.35 CV2.1 ; v1(23,46.35) CV2.1 ; CBY1.1 v1(24.9,64.05) ; v1(24.35,61.65) 25.275,61.65 LDO1.2 ; LDO3.2@24.384,14.366 24.384,15.159 v1(24.4,15.175) ; CIN3.1@24.95,12.85 v1(25.85,12.85) ; COUT3.1 v1(27.55,19.85) ; CIN1.1@26.8,62.05 v1(26.8,62.85) ; v1(31.7,56.2) 31.725,56.225 32.625,56.225 UUSB.2@32.65,56.25 ; v1(31.7,60.05) J1.5@32.5,60.05 ; v1(32.45,58.95) J1.5@32.45,59.75 ; J1.5@32.45,60.3 v1(32.45,61.1) ; C2.1@41.3,55.75 C2.1 ; RLED2.1@43.05,63.9 v1(43.85,63.9) ; COUT2.1@43.4,33.3 43.4,35.07 LDO2.8@43.4,36.5
  Top Layer w0.25: CA4.1 17.15,10.45 17.575,10.875 17.675,10.875 18.6,11.8 CA5.1 ; CA5.1@18.6,11.9 19.35,12.65 ADC.5
  Top Layer w0.4: v1(16.35,13.3) CA3.1 ; ADC.3 v1(18.05,17) ; ADC.5 v1(19.35,17) ; ADC.8 v1(21.3,17) ; v1(39.6,56.55) 39.6,55.6 C3.1 ; Rlim.1@40.8,35.95 Rlim.1@40.849,35.999 ; v1(40.8,56.8) 40.825,56.775 41.625,56.775 C1.1 41.6,56.7 41.6,55.55 C2.1 ; Rlim.1@40.849,35.949 42.549,35.949 v1(42.7,36.1) 43.1,36.5 43.4,36.5 43.45,36.55 CIN2.1
  Top Layer w0.5: CY2.2 7.35,35.8 v1(7,35.45) 6.65,35.1 1.45,35.1 0.75,35.8 v1(0.75,43.2) 0.75,50.6 v1(1.15,51) 1.55,51.4 6.55,51.4 7.35,50.6 v1(7.35,47.1) CY1.2 ; btm.2 v2(12.3,20.05) ; v1(17.35,30.85) RSTS.1 ; v2(18.95,30.85) 18.95,31.6 RSTS2.1 ; CBY_B2.2 27.3,48.75 v2(28.3,48.75) ; v1(39.65,30.7) 39.675,30.725 39.675,31.6 39.684,31.609 40.391,31.609 41.175,30.825 Rset.1 ; Rset.1@41.525,30.825 41.55,30.8 v1(41.55,29.55)
  Top Layer w1: v1(39.7,48.8) 39.7,47.725 39.675,47.7 v1(42.35,47.7) 42.45,47.6 U2.2 42.45,44.75 42.8,44.4 COUT1.1@43.3,44.4 ; COUT1.1@43.3,44 43.3,44.35 43.35,44.4 RF2.1 v1(45.1,43.45) ; COUT2.1@43.45,32.8 COUT2.1
  other v1: 1.1,35.45 44.1,36.1 42.7,36.9 44.1,36.9 7.35,39.3 42.45,45.15 6.95,51
  other v3: 47.25,9 2.15,23.05
NetADC_4: ADC.4 CA3.2 | length 2.4
  Top Layer w0.25: ADC.4@18.6,15.45 ADC.4 18.7,15.45 CA3.2@18.7,13.3
NetADC_6: ADC.6 CA4.2 CA5.2 | length 5.5
  Top Layer w0.25: CA4.2 20,10.3 CA5.2 ADC.6
NetADC_7: ADC.7 J2.1 pad.10 | length 22
  Top Layer w0.25: J2.1 33.142,5.358 33.142,6.008 pad.10 23.4,8.05 21.35,10.1 21.35,12.724 20.65,13.424 ; 20.65,13.424 ADC.7 20.65,13.424
NetADC_10: ADC.10 U1.17 | length 19.2
  Top Layer w0.2: U1.17 16.25,30.35 20.565,26.035 20.565,25.285 v2(20.65,25.2) ADC.10
NetADC_11: ADC.11 U1.14 | length 20.8
  Top Layer w0.2: U1.14 14.75,26.8 v1(17.9,23.65) ; ADC.11 v1(20,23.65)
  Bottom Layer w0.2: v1(17.9,23.65) v1(20,23.65)
NetADC_12: ADC.12 U1.15 | length 20
  Top Layer w0.2: U1.15 15.25,27.95 17.9,25.3 v1(17.9,24.75) ; ADC.12 19.35,24.7 v1(19.4,24.75)
  Bottom Layer w0.2: v1(17.9,24.75) v1(19.4,24.75)
NetADC_13: ADC.13 U1.16 | length 18.6
  Top Layer w0.2: U1.16 15.75,29 v2(18.7,26.05) ADC.13
NetADC_15: ADC.15 U1.13 | length 18.7
  Top Layer w0.2: U1.13 14.25,26 17.4,22.85 ADC.15
NetCBY1_2: CBY1.2 LDO1.4 | length 1.5
  Top Layer w0.5: CBY1.2 22.713,64.037 22.713,62.563 LDO1.4
NetCBY3_1: CBY3.1 LDO3.4 | length 1.4
  Top Layer w0.25: CBY3.1 25.143,18.007 25.143,17.033 LDO3.4
NetCCSV+_1: btm.1 CCSV+.1 OP1.1 top.2 | length 20.7
  Top Layer w0.2: btm.1 9.2,19.775 8.95,19.525 8.775,19.525 5.3,16.05 2.7,16.05 1.9,15.25 1.9,13.9 2.65,13.15 7.55,13.15 CCSV+.1 7.87,12.87 OP1.1
  Top Layer w0.5: btm.1 top.2
NetCf1_1: Cf1.1 RF1.1 RF2.2 U2.3 | length 4.7
  Top Layer w0.25: U2.3@43.4,46.4 RF2.2@44.8,46.4
  Top Layer w0.6: U2.3 U2.3@43.4,46.375 ; Cf1.1 44.8,46.45 44.85,46.4 RF2.2
NetCf1_2: Cf1.2 CIN2.2 COUT1.2@43.3,42.6 D.1 LDO2.1 LDO2.2 LDO2.3 LDO2.6 RF1.2 | length 34.3
  Top Layer w0.25: LDO2.6 42.4,34.85 40.1,34.85 39.6,35.35 39.6,38.45 40.1,38.95 43.2,38.95 43.4,38.75 LDO2.3 LDO2.2 LDO2.1 44.4,38.9
  Top Layer w0.4: 44.4,38.9 44.75,39.25 CIN2.2
  Top Layer w0.6: 42.288,41.712 43.225,40.775 45.925,40.775 46.25,40.45 46.25,39.3 CIN2.2 ; COUT1.2@43.3,42.5 46.05,42.5 46.8,43.25 RF1.2 46.75,47.95 46.75,48.85 46.2,49.4 Cf1.2
  Top Layer w1: D.1@40.4,41.712 D.1 42.288,41.712 42.512,41.712 COUT1.2@43.3,42.5
NetCIN3_2: CIN3.2 COUT2.2 J2.3 LDO2.9 LDO2.10 LDO3.1 LDO3.3 | length 66.1
  Top Layer w0.25: LDO3.1 23.5,14.34 23.5,15.45 24,15.95 24.9,15.95 25.318,15.532 LDO3.3 ; LDO2.9 43.9,34.6 44.7,33.8 45.725,33.8 46.15,33.375 COUT2.2
  Top Layer w0.4: LDO3.1 23.45,14.226 CIN3.2@23.45,12.9 ; J2.3 30.746,5.254 30.746,4.854 31.3,4.3 33.7,4.3 34.2,4.8 v2(34.2,11.05)
  Top Layer w0.5: LDO2.10 45.53,35.07 46.1,34.5 COUT2.2@46.1,33.85 ; COUT2.2 COUT2.2@46.15,33.65
  Top Layer w1: CIN3.2 23.55,12.531 25.031,11.05 v2(34.2,11.05) ; v2(39.45,11.05) 40.8,11.05 46.1,16.35 COUT2.2@46.1,33.3
  Bottom Layer w1: v2(34.2,11.05) v2(39.45,11.05)
NetCS_POT_1: 1k.1 Rsense.2 SEN.3 | length 5.2
  Top Layer w0.2: 4,14.39 4.02,14.37 7.58,14.37 Rsense.2 7.75,14.35 8.025,14.625 SEN.3
NetCS_POT_2: 1k.2 RCS.2 | length 7.3
  Top Layer w0.25: 1k.2@3.777,11.423 5.1,10.1 5.1,7.7 6.3,6.5 7.075,6.5 7.3,6.275 RCS.2
NetCSdiv_top_1: top.1 U1.11 | length 20.4
  Top Layer w0.2: top.1 11.2,22.175 12.4,23.375 v1(12.4,36.55) ; v1(12.6,39.3) 12.569,39.3 11.95,39.919 11.95,40.583 12.067,40.7 U1.11
  Bottom Layer w0.2: v1(12.4,36.55) 12.4,39.019 12.6,39.219 v1(12.6,39.3)
NetCset_2: Cset.2 LDO2.7 Rset.2 | length 4.3
  Top Layer w0.25: Rset.2 41.85,34.175 42.475,34.175 42.9,34.6 LDO2.7
  Top Layer w0.5: Cset.2 39.707,33.157 40.457,33.157 41.175,33.875 Rset.2
NetCY2_1: CY2.1 Rext.2 Y1.1 | length 8.2
  Top Layer w0.2: Y1.1 3.95,40.15 5.6,41.8 CY2.1 7.4,41.8 8.55,42.95 8.55,43.25 Rext.2
NetD_PSU_2: D.2 L1.2 U2.1 | length 3.8
  Top Layer w1: L1.2@38.55,44.988 D.2 40.793,45.031 40.86,45.031 40.86,45.86 U2.1@41.3,46.3
NetJ1_1: J1.1 RMEAS.1 | length 3.6
  Top Layer w0.4: J1.1 35.075,60.025 35.075,58.825 35.8,58.1 RMEAS.1
NetJ2_4: J2.4 U1.22 | length 54.2
  Top Layer w0.2: U1.22 18.75,37.9 20.15,36.5 31.05,36.5 31.9,35.65 31.9,18.3 35.043,15.157 35.043,4.743 34,3.7 30.45,3.7 29.43,4.72 29.43,5.32 J2.4
NetJ2_5: J2.5 U1.25 | length 55.8
  Top Layer w0.2: U1.25 29.55,40.2 32.414,37.336 32.414,18.436 35.55,15.3 35.55,4.65 34.2,3.3 29.05,3.3 28.2,4.15 28.2,5.3 J2.5
NetJ2_6: J2.6 U1.26 | length 59.1
  Top Layer w0.2: U1.26 29.9,40.7 32.929,37.671 32.929,18.471 36.057,15.343 36.057,4.507 34.45,2.9 27.95,2.9 26.9,3.95 J2.6
NetJ2_7: J2.7 U1.27 | length 62
  Top Layer w0.2: U1.27 30.2,41.2 33.443,37.957 33.443,18.607 36.564,15.486 36.564,4.364 34.7,2.5 27.3,2.5 25.65,4.15 J2.7
NetJ2_8: J2.8 U1.28 | length 65.1
  Top Layer w0.2: U1.28 30.55,41.7 33.957,38.293 33.957,18.693 37.071,15.579 37.071,4.221 34.9,2.05 26.5,2.05 24.4,4.15 J2.8
NetJ2_9: J2.9 U1.29 | length 68.5
  Top Layer w0.2: U1.29 30.95,42.2 34.471,38.679 34.471,18.829 37.579,15.721 37.579,4.029 35.15,1.6 25.45,1.6 23.15,3.9 J2.9
NetJ2_10: J2.10 U1.30 | length 71.6
  Top Layer w0.2: U1.30 31.3,42.7 34.986,39.014 34.986,18.964 38.086,15.864 38.086,3.836 35.4,1.15 24.65,1.15 21.9,3.9 J2.10
NetJ2_11: J2.11 U1.31 | length 74.6
  Top Layer w0.2: J2.11 20.65,3.95 23.85,0.75 35.6,0.75 38.593,3.743 38.593,15.957 35.5,19.05 35.5,39.25 31.55,43.2 U1.31
NetJ2_13: J2.13 Q1.E | length 10.1
  Top Layer w0.25: Q1.E 10.6,8.1 14.5,4.2 17.75,4.2 18.15,4.6 J2.13
NetLDO2_5: LDO2.5 Rlim.2 | length 1.6
  Top Layer w0.25: Rlim.2@40.8,37.95 Rlim.2@40.815,37.965 ; Rlim.2@40.815,37.915 42.4,37.915 LDO2.5
NetLED1_2: LED1.2 RLED1.2 | length 1.1
  Top Layer w0.5: LED1.2 19.3,63.75 19.3,62.75 RLED1.2
NetLED1_STS_1: RSTS.2 STS1.1 | length 1.7
  Top Layer w0.2: STS1.1@17.15,34.95 17.15,33.85 RSTS.2 RSTS.2@17.55,33.85
NetLED2_1: PWR.1 RLED2.2 | length 1.2
  Top Layer w0.4: PWR.1@39.85,63.9 RLED2.2
NetLED2_STS_1: RSTS2.2 STS2.1 | length 1.3
  Top Layer w0.2: STS2.1 18.7,34.4 18.7,33.9 18.95,33.65 RSTS2.2
NetOP1_4: OP1.4 Q1.B | length 1.9
  Top Layer w0.25: Q1.B 10.6,10 11.31,10.71 OP1.4
NetPBOOT0_2: BT0.1 PBOOT0.2 | length 2.2
  Top Layer w0.2: PBOOT0.2 16.24,50.81 BT0.1
NetPBOOT1_2: BT1.1 PBOOT1.2 | length 3.3
  Top Layer w0.2: BT1.1 22.44,33.85 PBOOT1.2
NetSEN_1: SEN.1 U1.10 | length 26.9
  Top Layer w0.2: SEN.1 9.304,16.525 9.504,16.725 9.504,17.704 10.2,18.4 10.2,23 11.5,24.3 v1(11.5,37.45) ; v1(11.5,39.15) 11.5,40.85 11.85,41.2 U1.10
  Bottom Layer w0.2: v1(11.5,37.45) v1(11.5,39.15)
NRST: ADC.9 CBY.2 SW.1 SW.2 U1.7 | length 48.7
  Top Layer w0.2: CBY.2 1.85,31.15 SW.1 SW.2 ; v1(10.55,24.75) 10.55,28.95 SW.2 ; U1.7 11.8,42.7 11.65,42.55 9.1,42.55 8.35,41.8 8.35,31.15 SW.2 ; v1(13.286,23.964) 13.8,23.45 13.8,19.65 15,18.45 19.7,18.45 21.3,20.05 ADC.9
  Bottom Layer w0.2: v1(10.55,24.75) 11.336,23.964 v1(13.286,23.964)
OSCIN: CY1.1 U1.5 Y1.2 | length 11.6
  Top Layer w0.2: Y1.2 3.95,46.15 5.5,44.6 CY1.1 11.15,44.6 12.05,43.7 U1.5
OSCOUT: Rext.1 U1.6 | length 1.7
  Top Layer w0.2: Rext.1@11.1,43.2 U1.6
Status_LED1: STS1.2 U1.18 | length 2.6
  Top Layer w0.2: U1.18 16.75,37.73 17.15,37.33 STS1.2
Status_LED2: STS2.2 U1.19 | length 2.9
  Top Layer w0.2: U1.19 17.25,38 18.1,37.15 18.1,36.6 STS2.2
SWCLK: PSWD.4 U1.37 | length 17.7
  Top Layer w0.2: PSWD.4 13.91,55.45 16.1,55.45 17.7,53.85 17.7,51.5 19.75,49.45 U1.37
SWDIO: PSWD.2 U1.34 | length 20.4
  Top Layer w0.2: PSWD.2 15.65,56.25 18,56.25 20.4,53.85 v1(20.4,47.55) ; v1(20.373,44.7) U1.34
  Bottom Layer w0.2: v1(20.373,44.7) 20.386,44.714 20.386,47.536 v1(20.4,47.55)
SWO: PSWD.6 U1.39 | length 19.5
  Top Layer w0.2: PSWD.6 11.87,54.95 16,54.95 17.24,53.71 17.24,49.441 18.75,47.931 U1.39
USB_IN_N: U1.32 UUSB.4 | length 20.5
  Top Layer w0.261: U1.32 25.6,43.7 34.331,52.431 34.331,55.147 34.483,55.3 UUSB.4
USB_IN_P: U1.33 USB_PU.1 UUSB.3 | length 19.8
  Top Layer w0.261: U1.33 24.65,44.2 25.448,44.2 33.87,52.621 33.87,55.147 33.717,55.3 UUSB.3
USB_OUT_N: J1.2 UUSB.6 | length 3.4
  Top Layer w0.25: J1.2 34.4,57.95 35.15,57.2 UUSB.6
USB_OUT_P: J1.3 UUSB.1 | length 3.4
  Top Layer w0.25: UUSB.1 33.05,57.2 33.225,57.375 33.75,57.9 J1.3
pads on no net: 1k.3 ADC.14 J1.4 J1.MH1 J1.MH2 J1.Shell LDO2.4 PSWD.3 U1.2 U1.3 U1.4 U1.12 U1.20 U1.40 U1.41 U1.42 U1.43 U1.45 U1.46

## Polygon pours and split planes (outlines as drawn)
GND on Bottom Layer "NONET_L01_P-001" (solid, pour order 0): 0,1.6 0,63.7 cw(c2.05,63.7) 2.1,65.749 2.1,65.75 47.6,65.75 47.6,65.749 cw(c47.55,63.3) 50,63.3 50,1.7 cw(c47.75,1.7) 47.75,-0.55 2.15,-0.55 2.1,-0.549 cw(c2.15,1.6)

## Silkscreen, mask and mechanical layers (free items; w line width, h text height)
Top Overlay:
  lines w0.1: 6.95,41.1 7.7,41.1 ; 6.95,45.3 7.7,45.3 ; 7.25,15.1 7.9,15.1 ; 7.45,12.2 8.25,12.2 ; 8.3,5.45 8.3,6.6 ; 8.85,7.75 8.85,9.05 ; 9.9,42.9 9.9,44.05 ; 10.2,19.5 10.2,20.6 ; 10.2,21.35 10.2,22.4 ; 10.25,39.85 10.25,40.25 ; 10.25,40.9 10.25,41.3 ; 12.35,12.15 13.15,12.15 ; 12.6,17.25 13.35,17.25 ; 12.8,49.5 13.6,49.5 ; 13.05,6.2 14,5.3 ; 14.05,49.2 14.45,49.2 ; 14.9,20.65 15.7,20.65 ; 15.75,49.85 16.75,49.85 ; 18.85,61.65 19.9,61.65 ; 20.85,61.3 21.6,61.3 ; 21.8,46.15 21.8,46.55 ; 23.4,63.65 23.4,64.45 ; 24.15,45.5 25.2,45.5 ; 37.85,57.75 37.85,58.45 ; 40.05,33.05 40.8,33.05 ; 40.3,37 41.3,37 ; 41.15,54.8 41.95,54.8 ; 41.4,33.05 42.55,33.05 ; 42.1,63.35 42.1,64.5 ; 42.35,56.35 42.35,57.15 ; 42.8,54.8 43.4,54.8 ; 42.9,43.3 43.7,43.3 ; 44.55,45.5 45.65,45.5 ; 45.5,49.05 45.5,49.9 ; 8.85,9.05 8.65,8.75 9.05,8.75 8.85,9.05 ; 14,5.3 13.7,5.3 14,5.6 14,5.3 ; 6.75,5.15 6.75,6.85 9.95,6.85 9.95,5.15 6.75,5.15 ; 16.8,35.65 17.15,35.3 17.45,35.65 16.8,35.65 ; 18.05,35.65 18.35,35.3 18.7,35.65 18.05,35.65 ; 19.95,63.45 20.25,63.8 19.95,64.15 19.95,63.45 ; 39.6,62.9 40,63.35 40.35,62.9 39.6,62.9
  lines w0.2: 17.6,56.27 17.6,58.85 29,58.85 29,65.25 17.62,65.25 17.6,65.27 ; 18.7,25 18.7,22.65 ; 36.5,53.3 36.5,58.75 47.35,58.75 47.35,51.9 40.55,51.9 ; 38.65,52 39.25,52 ; 18.7,22.65 18.45,23 18.95,23 18.7,22.65 ; 0.35,52.55 0.35,55.7 11.4,55.7 11.4,52.55 0.35,52.55 ; 22.6,11.95 22.6,21.05 31.85,21.05 31.85,11.95 22.6,11.95 ; 35,25.75 49.5,25.75 49.5,51.25 38.5,51.25 35,51.25 35,25.75
  text "3V3" at 26.6,58.95 h0.7
  text "3V3" at 18.65,57 h0.7
  text "GND (3) 3V3 / SWO SWCLK SWDIO" at 0.55,52.85 h0.7
  text "Filter" at 47.05,52.3 h0.7 r90
  text "GND" at 21.45,51.8 h0.7 r90
  text "5V" at 36.5,51.4 h0.7
  text "3V3" at 22.75,39.25 h0.7
  text "GND" at 22.65,30 h0.7
  text "SDO / SCLK / CS / SDI" at 23.15,26.6 h0.7 r90
  text "12V Boost" at 35.45,26.15 h0.7
  text "GND" at 1.05,20.1 h0.7
  text "V+" at 5.8,12.3 h0.7
  text "5V" at 31.55,12.25 h0.7 r90
  text "12V" at 40.05,10.5 h0.7
  text "Iret" at 6.1,7.65 h0.7
  text "Idrv" at 12.15,6.45 h0.7
  text "GND" at 46.4,6.1 h0.7
  text "FB" at 11.2,5.25 h0.7 r90
  text "5V / IDRIVE / IRET" at 15,0.65 h0.7 r90
  text "8 GPIOS / 12V / GND / VPHOTO" at 40.25,0.5 h0.7 r90
board_shape:
  lines w0.2: 0,1.6 0,63.7 ; 2.1,65.75 47.6,65.75 ; 2.15,-0.55 47.75,-0.55 ; 50,1.7 50,63.3
Mechanical 11:
  lines w0.2: 0,1.6 ccw(c2.15,1.6) 2.1,-0.549 ; 0,63.7 cw(c2.05,63.7) 2.1,65.749 ; 47.6,65.749 cw(c47.55,63.3) 50,63.3 ; 47.75,-0.55 ccw(c47.75,1.7) 50,1.7

## Text inside footprints (layer, text, board x,y; h text height)
J1: Mechanical 2 "PCB Edge" at 35.05,66.25 h0.41 r180
LED1: Top Overlay "+" at 17.95,64.1 h0.76 r270
PSWD: Top Overlay "1" at 13.96,62.57 h1.02 r180; Top Overlay "6" at 6.06,59.97 h1.02 r180; Top Overlay "2" at 14.26,60.03 h1.02 r180; Top Overlay "5" at 6.06,62.51 h1.02 r180
PWR: Top Overlay "+" at 39.55,60.9 h0.76
STS1: Top Overlay "+" at 17.45,37.6 h0.76 r180
STS2: Top Overlay "+" at 18.7,37.6 h0.76 r180